# Altium PCB power_management_PCB.PcbDoc
Units mil, origin at the board's own origin, x right, y up, seen from the top; angles counter-clockwise.
Board outline 6000 x 4000 mil, 2 copper layers (Top Layer, Bottom Layer); 18 components, 11 nets, 48 pads, 0 vias.
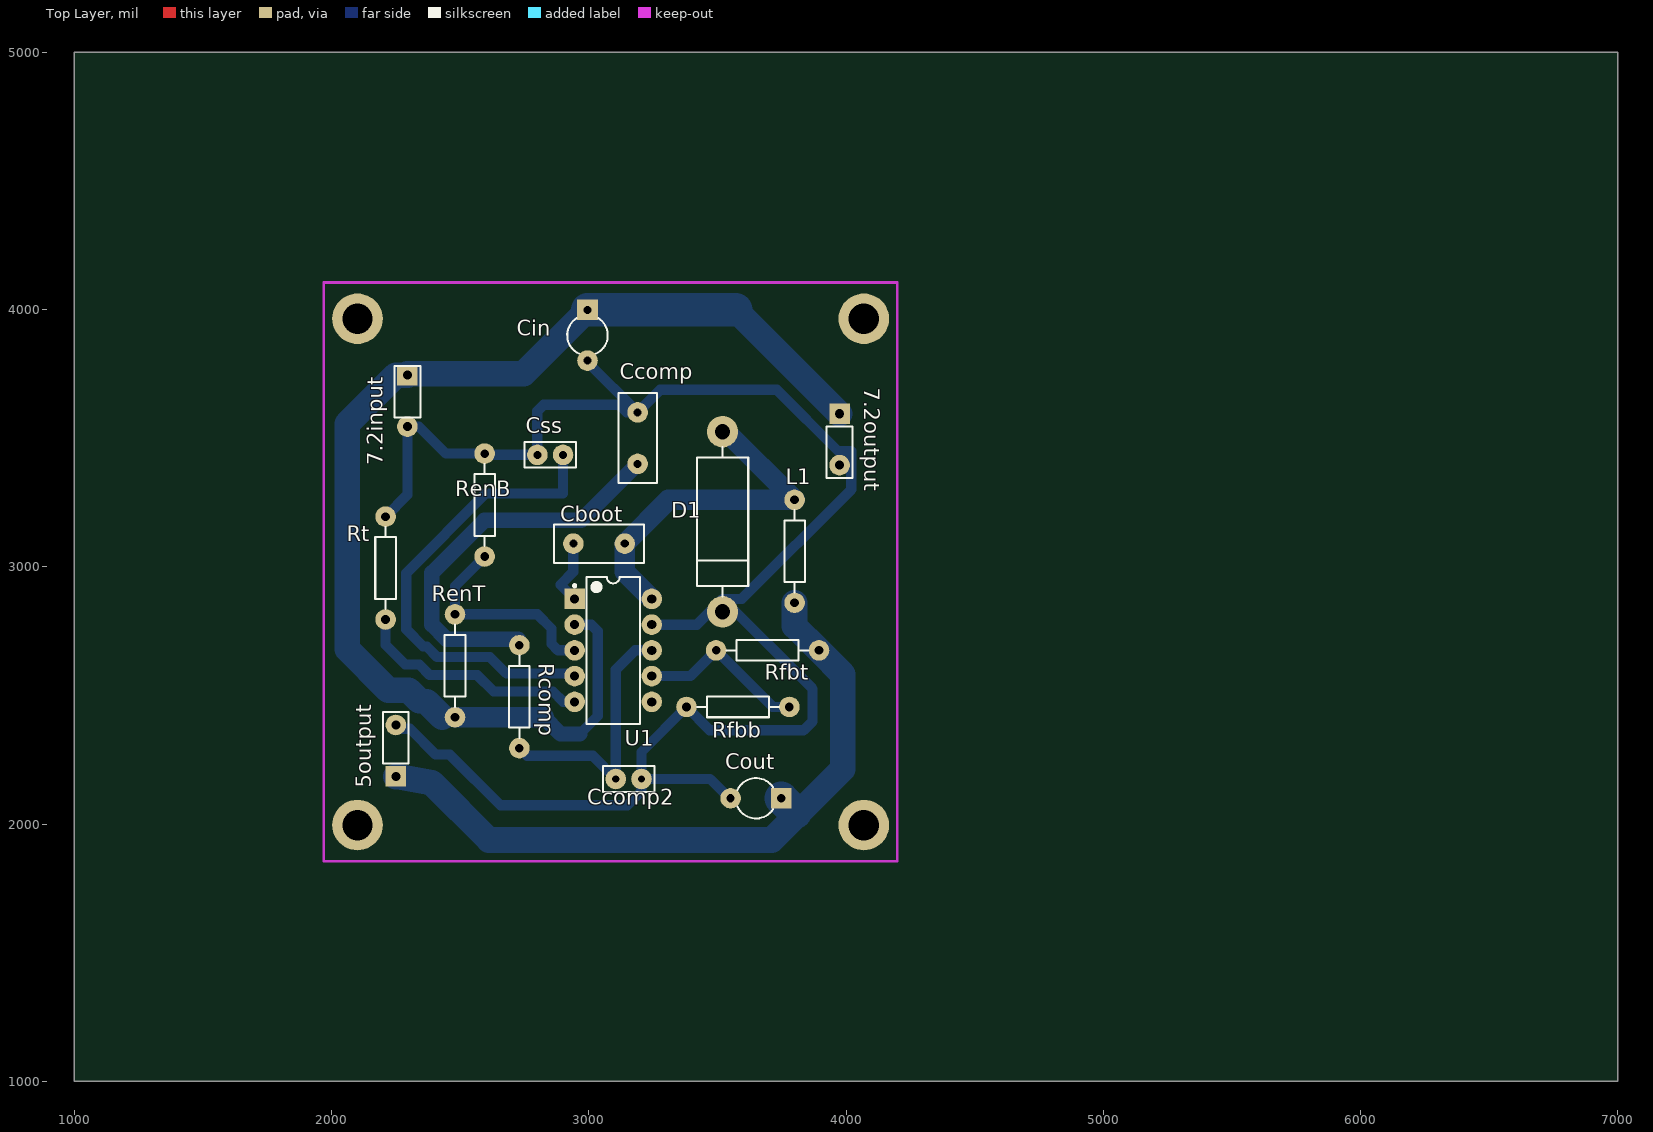
[diagram p0: Top Layer view]
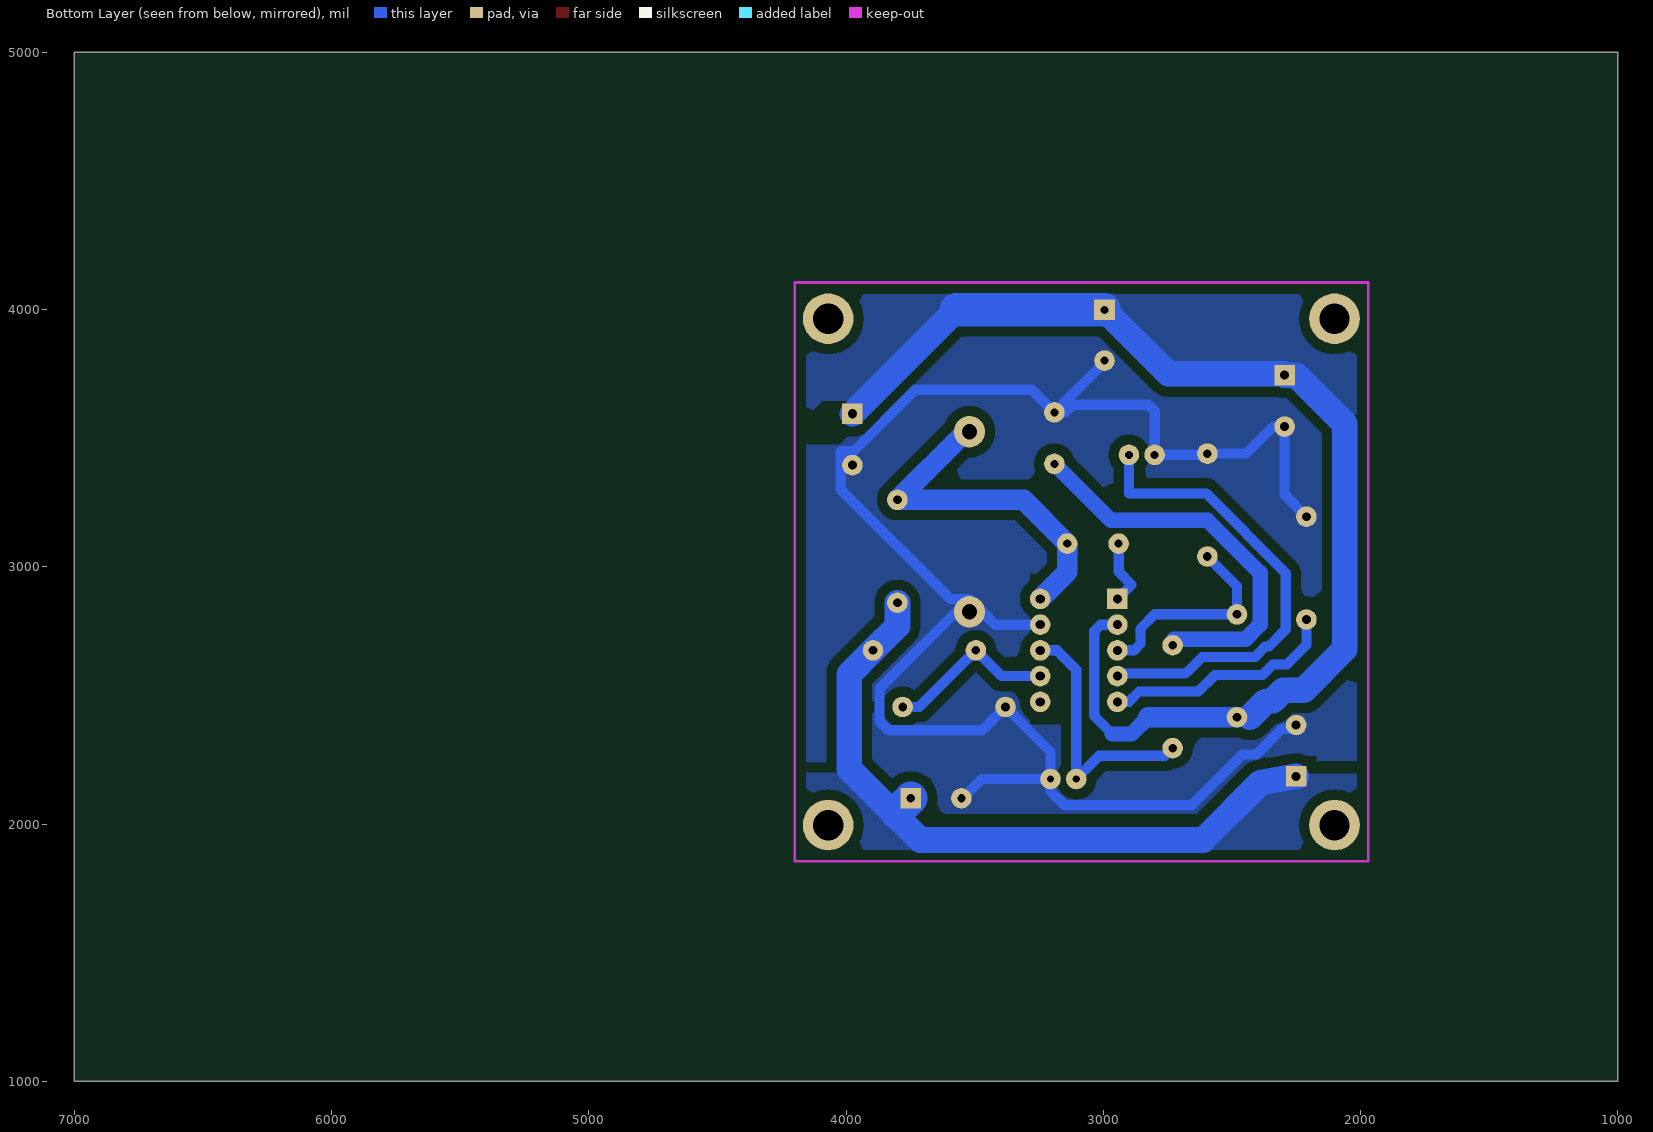
[diagram p1: Bottom Layer view, seen from below]

## Layer stack, top to bottom
Top Solder: solder mask 0.4, Solder Resist, Dk 3.5
Top Layer: signal copper 1.4
Dielectric 1: dielectric 12.6, FR-4, Dk 4.8
Bottom Layer: signal copper 1.4
Bottom Solder: solder mask 0.4, Solder Resist, Dk 3.5

## Board outline
1000,1000 7000,1000 7000,5000 1000,5000

## Design rules (kind name [scope] priority, off if disabled: settings)
Clearance [All] p1: gap=10 ignorepadtopadclearanceinfootprint=FALSE
PlaneClearance [All] p1: clearance=30
PlaneConnect [All] p1: planeconnectstyle=Direct reliefexpansion=20 reliefentries=4 reliefconductorwidth=10 reliefairgap=10
PolygonConnect [All] p1: connectstyle=Direct reliefconductorwidth=10 reliefentries=4 polygonreliefangle="90 Angle" airgapwidth=10
RoutingLayers [All] p1: top layer_v5=FALSE bottom layer_v5=TRUE
RoutingVias [All] p1: holewidth=28 width=50 viastyle="Through Hole" minholewidth=28 minwidth=50 maxholewidth=28 maxwidth=50
SolderMaskExpansion [All] p1: expansion=4
Width [All] p1: maxlimit=150 minlimit=10 preferedwidth=40 minimp=50.000000 maximp=50.000000 favimp=50.000000
27 further rules are at their usual default settings.

## Components (designator, comment, footprint, x,y, rotation, side; value= is the part's Value field where it differs from the comment)
5output "Header 2" HDR1X2#1 2250,2285 r90 top
7.2input "Header 2" HDR1X2#2 2295,3730 r270 top (schematic designator 7.5input)
7.2output "Header 2" HDR1X2#1 3975,3495 r270 top (schematic designator 7.5output)
Cboot "GRM155R61A104KA01D" RAD-0.2 3040,3090 r0 top value=100nF
Ccomp "CC0805KRX7R9BB471" RAD-0.2 3190,3500 r90 top value=470pF
Ccomp2 "C0805C180K5GACTU" RAD-0.1#1 3155,2175 r0 top value=18pF
Cin "GRM188R61A225KE34D" CAPR5-4X5 2995,3900 r270 top value=2.2uF
Cout "C2012X5R1A476M125AC" CAPR5-4X5 3650,2100 r180 top value=47uF
Css "CC0805KRX7R9BB682" RAD-0.1#2 2850,3435 r180 top value=6.8nF
D1 "B340A-13-F" DIODE-0.7 3520,3175 r270 top value=500mV
L1 "SRN6045-3R3Y" AXIAL-0.4 3800,3060 r90 top value=3.3uH
Rcomp "RC1206FR-0756KL" AXIAL-0.4 2730,2495 r90 top value=56k
RenB "RC1206FR-0730KL" AXIAL-0.4 2595,3240 r90 top value=30k
RenT "ERJ-8ENF1103V" AXIAL-0.4 2480,2615 r90 top value=110k
Rfbb "RC1206FR-078K2L" AXIAL-0.4 3580,2455 r180 top value=8.2k
Rfbt "RC1206FR-0743KL" AXIAL-0.4 3695,2675 r180 top value=43k
Rt "CRCW1206110KFKEA" AXIAL-0.4 2210,2995 r90 top value=110k
U1 "TPS54140DGQR" N10A 3095,2675 r0 top value=N/A

## Footprints (in the part's own frame and the unit in brackets; to place one, negate y for a bottom-side part, rotate by r counter-clockwise, add the part's x,y. Pads: shape width x height; smd on the part's side, far side on the other; paste and mask are expansions set on the pad)
AXIAL-0.4 [mil] "Axial Device, Thru-Hole; 2 Leads; 0.4 in Pin Spacing"
  round 80 hole 33.46: 1(-200,0) 2(200,0)
  silkscreen extent -160,-40 160,40
CAPR5-4X5 [mil] "Capacitor; 2 Leads"
  rect 80x80 hole 31.5: 1(-98.43,0)
  round 80 hole 31.5: 2(98.43,0)
  silkscreen extent -66,-79 72,79
DIODE-0.7 [mm] "Diode, Thru-Hole; 2 Leads; 0.7 in Pin Spacing"
  round 3.1 hole 1.5: 1(-8.89,0) 2(8.89,0)
  silkscreen extent -7.37,-2.54 7.37,2.54
HDR1X2#1 [mil] "Connector; Header; 2 Position"
  rect 80x80 hole 35.43: 1(-100,0)
  round 80 hole 35.43: 2(100,0)
  silkscreen extent -50,-50 150,50
HDR1X2#2 [mil] "Connector; Header; 2 Position"
  rect 80x80 hole 35.43: 1(-15,0)
  round 80 hole 35.43: 2(185,0)
  silkscreen extent -50,-50 150,50
N10A [mil] "DIP; 10 Leads; Row Spacing 7.62 mm; Pitch 2.54 mm"
  rect 80x80 hole 35.43: 1(-150,200)
  round 80 hole 35.43: 2(-150,100) 3(-150,0) 4(-150,-100) 5(-150,-200) 6(150,-200) 7(150,-100) 8(150,0) 9(150,100) 10(150,200)
  silkscreen extent -155,-285 104,285, body extent -128,-285 128,285, height 200
RAD-0.1#1 [mil] "Radial Cap, Thru-Hole; 2 Leads; 0.1 in Pin Spacing"
  round 80 hole 27.56: 1(-50,0) 2(50,0)
  silkscreen extent -100,-50 100,50
RAD-0.1#2 [mil] "Radial Cap, Thru-Hole; 2 Leads; 0.1 in Pin Spacing"
  round 80 hole 31.5: 1(-50,0) 2(50,0)
  silkscreen extent -100,-50 100,50
RAD-0.2 [mil] "Radial Cap, Thru-Hole; 2 Leads; 0.2 in Pin Spacing"
  round 80 hole 31.5: 1(-100,0) 2(100,0)
  silkscreen extent -175,-75 175,75

## Part data
5output 7.2input 7.2output: "Header, 2-Pin", LatestRevisionDate=17-Jul-2002, LatestRevisionNote="Re-released for DXP Platform.", Publisher="Altium Limited"
Cboot: "GRM155R61A104KA0", Manufacturer Name=MuRata, Manufacturer Part Number=GRM155R61A104KA01D, PackageReference=GRM155R61A104KA01D
Ccomp: "CC0805KRX7R9BB47", Manufacturer Name="Yageo America", Manufacturer Part Number=CC0805KRX7R9BB471, PackageReference=CC0805KRX7R9BB471
Ccomp2: Manufacturer Name=Kemet, Manufacturer Part Number=C0805C180K5GACTU, PackageReference=C0805C180K5GACTU
Cin: "GRM188R61A225KE3", Manufacturer Name=MuRata, Manufacturer Part Number=GRM188R61A225KE34D, PackageReference=GRM188R61A225KE34D
Cout: "C2012X5R1A476M12", Manufacturer Name=TDK, Manufacturer Part Number=C2012X5R1A476M125AC, PackageReference=C2012X5R1A476M125AC
Css: "CC0805KRX7R9BB68", Manufacturer Name="Yageo America", Manufacturer Part Number=CC0805KRX7R9BB682, PackageReference=CC0805KRX7R9BB682
D1: Manufacturer Name="Diodes Inc.", Manufacturer Part Number=B340A-13-F, PackageReference=B340A-13-F
L1: Manufacturer Name=Bourns, Manufacturer Part Number=SRN6045-3R3Y, PackageReference=SRN6045-3R3Y
Rcomp RenB Rfbb Rfbt: Manufacturer Name="Yageo America"
  Rcomp: Manufacturer Part Number=RC1206FR-0756KL, PackageReference=RC1206FR-0756KL
  RenB: Manufacturer Part Number=RC1206FR-0730KL, PackageReference=RC1206FR-0730KL
  Rfbb: Manufacturer Part Number=RC1206FR-078K2L, PackageReference=RC1206FR-078K2L
  Rfbt: Manufacturer Part Number=RC1206FR-0743KL, PackageReference=RC1206FR-0743KL
RenT: Manufacturer Name=Panasonic, Manufacturer Part Number=ERJ-8ENF1103V, PackageReference=ERJ-8ENF1103V
Rt: Manufacturer Name=Vishay-Dale, Manufacturer Part Number=CRCW1206110KFKEA, PackageReference=CRCW1206110KFKEA
U1: "TPS54160DGQR", Manufacturer Name="Texas Instruments", Manufacturer Part Number=TPS54140DGQR, PackageReference=TPS54160DGQR

## Free pads (board coordinates)
  round 196.85 hole 118.11: 1(4069.25,1995.75) 2(2100.75,1995.75) 3(2100.75,3964.25) 4(4069.25,3964.25)

## Nets (pads, with @x,y where several pads share a name; then routed paths per layer and width w, separated by ;. In a path a pad name is that pad's centre, name@x,y a point inside that pad or via, vN(x,y) a via of type N, cw(c..) or ccw(c..) an arc to the next point about the centre after c; other vN are vias at no path point)
0: 5output.2 7.2input.2 7.2output.2 Ccomp2.2 Ccomp.2 Cin.2 Cout.2 Css.2 D1.2 RenB.2 Rfbb.2 Rt.2 U1.9 | length 6956.6
  Bottom Layer w40: Rt.2 2295,3280 7.2input.2 2340,3545 2445,3440 RenB.2 2590,3435 Css.2 2800,3605 2825,3630 3117,3630 3147,3600 Ccomp.2 ; 5output.2@2250,2370 2305,2370 2405,2270 2460,2270 2657,2073 3150,2073 3205,2128 Ccomp2.2 ; Cin.2 2995,3795 Ccomp.2 ; U1.9 3420,2775 D1.2@3520,2875 ; Cout.2@3549.07,2097.5 3471.57,2175 Ccomp2.2 ; Ccomp.2 3278,3688 3731,3688 3969,3450 4020,3450 4020,3300 3595,2875 D1.2@3520,2875 ; Ccomp2.2 3205,2280 Rfbb.2 3470,2365 3835,2365 3870,2400 3870,2525 D1.2@3520,2875
Net5output_1: 5output.1 Cout.1 L1.1 Rfbt.1 | length 2762.4
  Bottom Layer w40: 3803.43,2045 3818.43,2045
  Bottom Layer w100: 5output.1 2390,2160 2612,1938 3711.43,1938 3818.43,2045 3987.5,2214.07 3987.5,2582.5 Rfbt.1 3800,2770 L1.1
  Bottom Layer w130: Cout.1 3803.43,2045
Net7.5input_1: 7.2input.1 7.2output.1 Cin.1 RenT.1 U1.2 | length 4708.3
  Bottom Layer w40: 2430,2415 RenT.1 ; U1.2 3010,2775 3035,2750 3035,2420 2965,2350
  Bottom Layer w60: 2825,2415 2890,2350 2965,2350
  Bottom Layer w70: 2340.78,2478.93 2366.07,2478.93 2370,2475
  Bottom Layer w80: RenT.1 2825,2415
  Bottom Layer w100: 7.2input.1 2250,3745 2061,3556 2061,2680 2221,2520 2299.71,2520 2340.78,2478.93 ; 7.2input.1@2295,3750 2746.57,3750 Cin.1 ; 2370,2475 2430,2415 ; 3571.57,3998.43 7.2output.1
  Bottom Layer w130: Cin.1 3571.57,3998.43
NetCboot_1: Cboot.1 U1.1 | length 258.5
  Bottom Layer w40: Cboot.1 2940,2980 2890,2930 U1.1
NetCboot_2: Cboot.2 D1.1 L1.2 U1.10 | length 1378.7
  Bottom Layer w40: D1.1 D1.1@3535,3525
  Bottom Layer w80: U1.10 3140,2980 Cboot.2 3310,3260 L1.2 D1.1@3535,3525
NetCcomp2_1: Ccomp2.1 Rcomp.1 U1.8 | length 1020.8
  Bottom Layer w40: Rcomp.1 2760,2265 3015,2265 Ccomp2.1 3105,2600 3180,2675 U1.8
NetCcomp_1: Ccomp.1 Rcomp.2 | length 1541.5
  Bottom Layer w40: Rcomp.2@2726.07,2718.93 Rcomp.2@2730,2715
  Bottom Layer w60: Rcomp.2@2726.07,2718.93 2446.07,2718.93 2390,2775 2390,2976 2594,3180 2970,3180 Ccomp.1
NetCss_1: Css.1 U1.4 | length 1836.8
  Bottom Layer w40: Css.1 2900,3285 2600,3285 2290,2975 2290,2757 2357,2690 2370.12,2690 2411.19,2648.93 2616.07,2648.93 2680,2585 2935,2585 U1.4
NetRenB_1: RenB.1 RenT.2 U1.3 | length 830.8
  Bottom Layer w40: RenB.1 2480,2925 RenT.2 2800,2815 2855,2760 2855,2700 2880,2675 U1.3
NetRfbb_1: Rfbb.1 Rfbt.2 U1.7 | length 667.5
  Bottom Layer w40: U1.7 3395,2575 Rfbt.2 3715,2455 Rfbb.1
NetRt_1: Rt.1 U1.5 | length 925.5
  Bottom Layer w40: Rt.1 2210,2696 2286,2620 2341.13,2620 2382.2,2578.93 2566.07,2578.93 2630,2515 2861.01,2515 2901.01,2475 U1.5
pads on no net: U1.6

## Polygon pours and split planes (outlines as drawn)
0 on Bottom Layer "Top Layer-No Net" (solid, remove dead copper, pour order 62): 1970,3430 2010,3430 2285,3705 2785,3705 3015,3935 3030,3920 3580,3920 4025,3475 4200,3475 4200,2200 3875,2200 3860,2215 3685,2040 2635,2040 2620,2025 2390,2255 2390,2260 2190,2260 2175,2245 1970,2245
Net7.5input_1 on Bottom Layer "Top Layer-No Net" (solid, remove dead copper, pour order 42): 2015,4075 4145,4075 4145,3590 4090,3645 3920,3645 3920,3675 3565,4030 2985,4030 2985,4025 2730,3770 2235,3770 2035,3570 2015,3570
Net5output_1 on Bottom Layer "Top Layer-No Net" (solid, remove dead copper, pour order 50): 1970,2215 1990,2195 2375,2195 2375,2155 2615,1915 3720,1915 3720,1930 3990,2200 4200,2200 4200,1855 1970,1855

## Keep-outs
Keep-Out Layer:
  lines w10: 1970,1855 1970,4105 4200,4105 4200,1855 1970,1855

## Other copper
Bottom Layer:
  pour cut-out: 2875,2975 3285,2975 3285,2390 3280,2385 2875,2385 2875,2975 2880,2970 2880,2965 2885,2960 2885,2975 2890,2980